# Altium PCB 激光昆虫_USB蓝牙版 - 双面板 板厚1.0mm.PcbDoc
Units mm, origin at the board's own origin, x right, y up, seen from the top; angles counter-clockwise.
Board outline 152.4 x 101.6 mm, 3 copper layers (Top Layer, Mid-Layer 14, Bottom Layer); 12 components, 10 nets, 37 pads, 37 vias.
Unrouted connection lines stored in the file: 2.
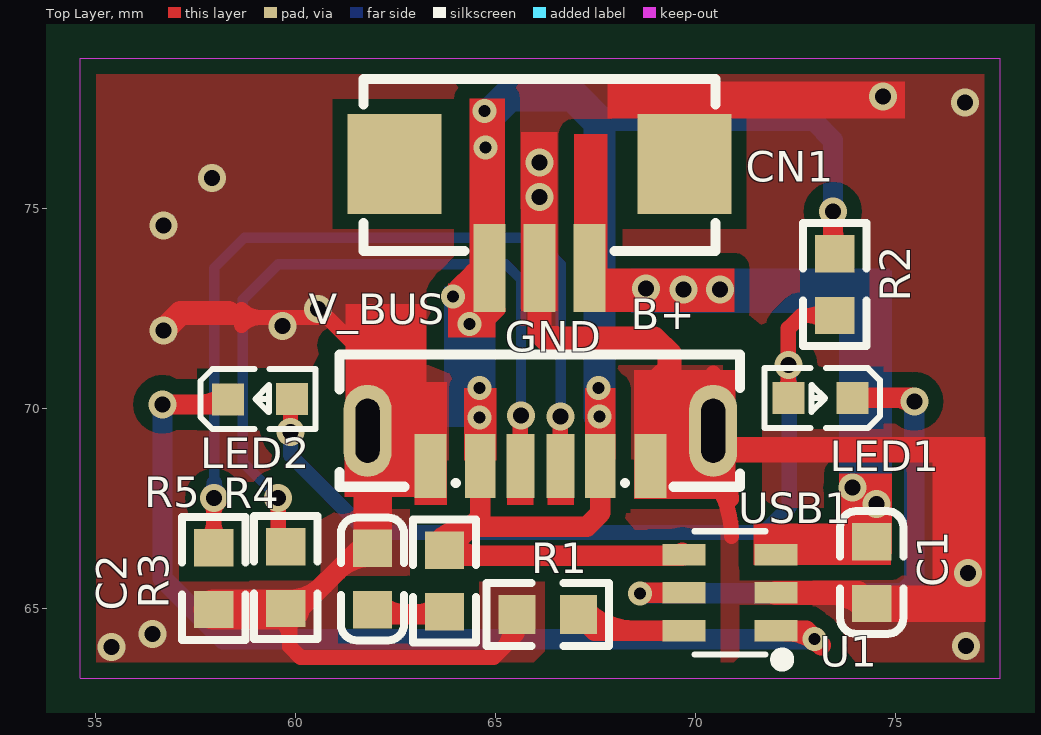
[diagram p0: Top Layer view]
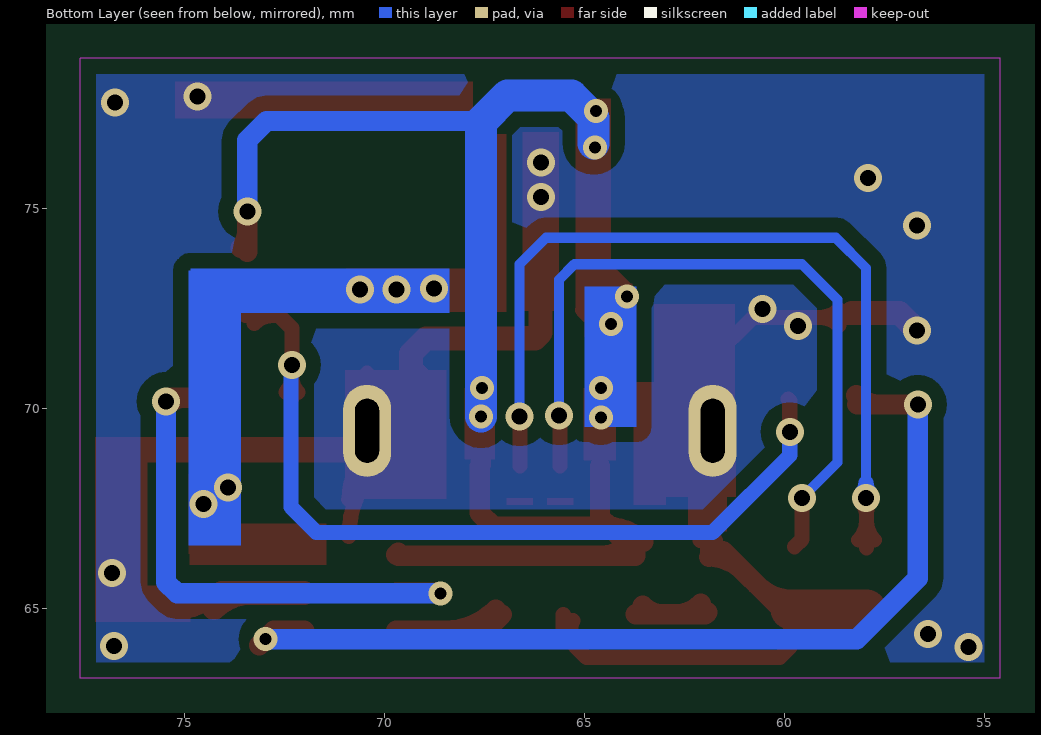
[diagram p1: Bottom Layer view, seen from below]
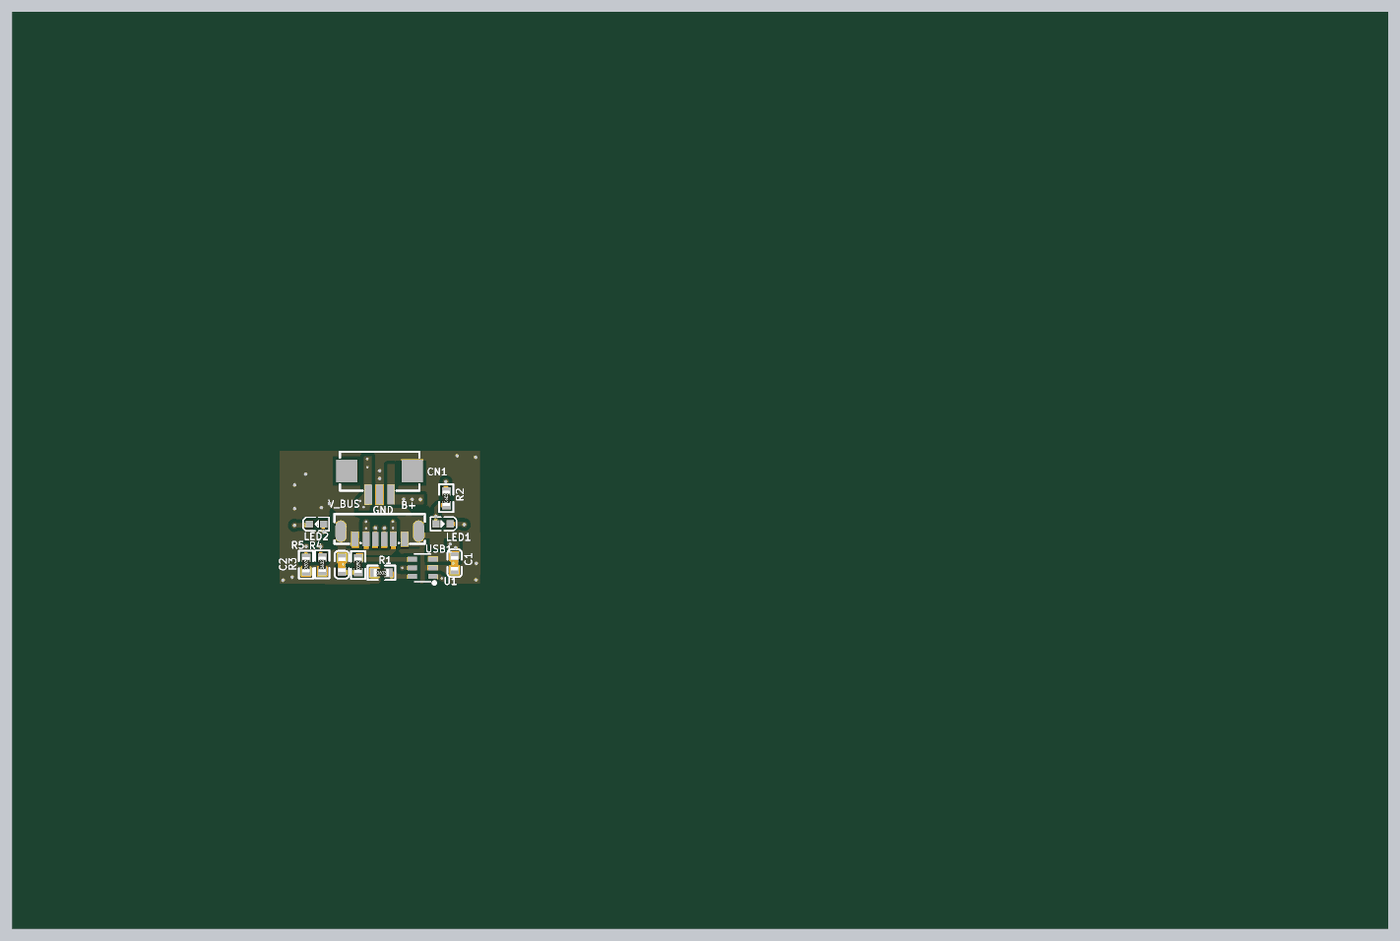
[diagram p2: 3D render of the assembled board from above, using the file's embedded part models]

## Layer stack, top to bottom
Top Layer: signal copper 0.0356
Dielectric: dielectric 0.32, FR-4, Dk 4.8
Mid-Layer 14: signal copper 0.0356
Dielectric: dielectric 0.32, FR-4, Dk 4.8
Bottom Layer: signal copper 0.0356

## Board outline
25.4,25.4 177.8,25.4 177.8,127 25.4,127

## Design rules (kind name [scope] priority, off if disabled: settings)
Clearance [All] p1: gap=0.254
ComponentClearance [All] p1: gap=0.254 collisioncheckmode=3 verticalgap=0 showdistances=FALSE
MinimumSolderMaskSliver [All] p1: minsoldermaskwidth=0.025
PolygonConnect [All] p1: connectstyle=Direct reliefconductorwidth=0.254 reliefentries=4 polygonreliefangle="90 Angle"
RoutingVias [All] p1: holewidth=0.711 width=1.27 viastyle="Through Hole" minholewidth=0.711 minwidth=1.27 maxholewidth=0.711 maxwidth=1.27
SilkToSilkClearance [All] p1: silktosilkclearance=-0.508
SilkscreenOverComponentPads [All] p1: minsilkscreentomaskgap=-0.508
SolderMaskExpansion [All] p1: expansion=0.102
TestPointUsage [All] p1: valid=0 allowmultiple=FALSE
Testpoint [All] p1: side=15 testpointundercomponent=TRUE minsize=1.016 maxsize=2.54 preferedsize=1.524 minholesize=0 maxholesize=1.016 preferedholesize=0.813 testpointgrid=0.025 style=1023 order=0-112345678
Width [All] p1: maxlimit=1.27 minlimit=0.254 preferedwidth=0.381
20 further rules are at their usual default settings.

## Components (designator, comment, footprint, x,y, rotation, side; value= is the part's Value field where it differs from the comment)
C1 "10uf/16v" 0603_C 74.4,65.9 r270 top
C2 "4.7uf/25v" 0603_C 61.918,65.741 r90 top
CN1 "" "HC-1.25-3P 卧贴" 66.15,75.475 r180 top
LED1 "" D0603 72.775,70.325 r180 top
LED2 "" D0603 59.45,70.175 r0 top
R1 "2.7K" 0603_R 66.3,64.85 r0 top
R2 "1K" 0603_R 73.475,73.1 r270 top
R3 "1R" 0603_R 63.718,65.691 r90 top
R4 "5.1K" 0603_R 59.75,65.775 r270 top
R5 "5.1K" 0603_R 57.95,65.75 r270 top
U1 "TP4083-42 4057" SOT-23-6 71.75,65.075 r90 top
USB1 "TYPE-C 6P LTH6.8" "TYPE C 6P 6.8MM" 66.025,69.7 r0 top

## Footprints (in the part's own frame and the unit in brackets; to place one, negate y for a bottom-side part, rotate by r counter-clockwise, add the part's x,y. Pads: shape width x height; smd on the part's side, far side on the other; paste and mask are expansions set on the pad)
0603_C [mm]
  rect 0.93x0.98 smd: 1(-0.77,0) 2(0.77,0)
  silkscreen extent -1.54,-0.79 1.54,0.79, body extent -0.8,-0.4 0.8,0.4, height 0.3
0603_R [mm]
  rect 0.93x0.98 smd: 1(-0.77,0) 2(0.77,0)
  silkscreen extent -1.53,-0.79 1.54,0.79, body extent -0.85,-0.4 0.85,0.4, height 0.56
D0603 [mm]
  rect 0.8x0.8 smd: A(0.459,0.062) K(-1.14,0.055)
  silkscreen extent -1.83,-0.69 1.05,0.82
"HC-1.25-3P 卧贴" [mm]
  rect 0.8x2.2 smd paste+0 mask+0.05: 1(-1.195,1.956) 2(0.055,1.956) 3(1.305,1.956)
  rect 2.35x2.5 smd paste+0 mask+0.05: 4(-3.575,-0.644) 5(3.685,-0.644)
  silkscreen extent -4.34,-2.77 4.46,1.53
SOT-23-6 [mm]
  rect 0.532x1.072 smd mask+0.051: 1(-0.63,-0.258) 2(0.32,-0.258) 3(1.27,-0.258) 4(1.27,2.04) 5(0.32,2.04) 6(-0.63,2.04)
  silkscreen extent -1.5,-0.56 1.86,1.78
"TYPE C 6P 6.8MM" [mm]
  oval 1.2x2.3 hole 0.6 slot 1.6 at 90 deg copper offset 0,0 paste+0 mask+0.05: 1(-4.23,-0.255) 1(4.411,-0.255)
  rect 0.7x1.6 smd paste-100 mask+0.05: A5(-0.41,-1.135) B5(0.591,-1.135)
  rect 0.76x1.6 smd paste-100 mask+0.05: A9(1.592,-1.135) B9(-1.41,-1.135)
  rect 0.8x1.6 smd paste-100 mask+0.05: A12(2.841,-1.135) B12(-2.66,-1.135)
  silkscreen extent -4.93,-1.66 5.08,1.65

## Part data
C1 C2: library part Cap, "Capacitor"
CN1: library part HC-1.25-3PLT
LED1 LED2: library part LED, "发光二极管"
R1 R2 R3 R4 R5: library part RES
U1: library part TP4057-42-SOT26-R
USB1: library part "TYPE-C 6P LTH6.5"

## Via types
v1: diameter 0.7, hole 0.4, Top Layer to Bottom Layer, tented both sides, 27 vias
v2: diameter 0.6, hole 0.3, Top Layer to Bottom Layer, tented both sides, 10 vias

## Nets (pads, with @x,y where several pads share a name; then routed paths per layer and width w, separated by ;. In a path a pad name is that pad's centre, name@x,y a point inside that pad or via, vN(x,y) a via of type N, cw(c..) or ccw(c..) an arc to the next point about the centre after c; other vN are vias at no path point)
B+: C1.1 CN1.1 U1.3 | length 4.4
  Top Layer w0.381: C1.1@74.15,66.345 C1.1@74.4,66.595
  Bottom Layer w0.381: v1(69.698,72.974) 71.78,72.974 71.857,72.898 ; v1@69.81,72.861 cw(c70.083,72.589) 70.083,72.974 cw(c70.083,73.359) v1@69.81,73.087 ; v1@70.499,72.861 ccw(c70.227,72.589) 70.227,72.974 ccw(c70.227,73.359) v1@70.499,73.087 ; v1@70.725,72.861 cw(c70.997,72.589) 70.997,72.974 cw(c70.997,73.359) v1@70.725,73.087
  other v1: 74.524,67.615 73.914,68.021 70.612,72.974 68.758,73
CC1: R4.1 USB1.A5 | length 18.8
  Top Layer w0.381: v1(59.563,67.767) 59.563,66.732 R4.1 ; USB1.A5 v1@65.615,69.806
  Bottom Layer w0.254: v1(59.563,67.767) 58.674,68.656 58.674,72.72 59.563,73.609 65.253,73.609 65.634,73.228 v1(65.634,69.825)
CC2: R5.1 USB1.B5 | length 23.6
  Top Layer w0.381: R5.1@57.756,66.714 ccw(c57.287,67.183) 57.95,67.183 ccw(c58.613,67.183) R5.1@58.144,66.714 ; v1@57.85,67.654 cw(c57.609,67.413) 57.95,67.413 ; R5.1 v1@57.95,67.754 ; 57.95,67.351 cw(c58.379,67.351) v1@58.076,67.654 ; USB1.B5 66.616,69.791 v1(66.624,69.799)
  Bottom Layer w0.254: v1(57.963,67.767) 57.963,73.515 58.718,74.27 65.964,74.27 66.624,73.609 v1(66.624,69.799)
  Bottom Layer w0.381: v1@57.85,67.88 ccw(c57.578,68.152) 57.963,68.152 ccw(c58.348,68.152) v1@58.076,67.88 ; v1@66.624,69.723 v1(66.624,69.799)
CHRG: LED2.K U1.1 | length 26.9
  Top Layer w0.508: v1(56.667,70.104) LED2.K@58.184,70.104 ; 57.653,70.104 ccw(c57.653,70.888) LED2.K@58.207,70.334 ; U1.1 72.766,64.445 v2(72.974,64.237) ; U1.1@72.278,64.433 cw(c72.278,63.226) v2@73.132,64.079 ; U1.1@72.28,64.433 cw(c72.421,63.612) v2@73.01,64.201 ; U1.1@72.36,64.445 cw(c72.36,63.623) v2@72.942,64.204
  Bottom Layer w0.508: v1@56.667,70.129 v1(56.667,70.104) 56.667,65.761 58.191,64.237 v2(72.974,64.237)
GND: C1.2 C2.2 CN1.2 CN1.4 R1.1 R4.2 R5.2 U1.2 USB1.1 USB1.A12 USB1.B12 | length 51.6
  Top Layer w0.381: 58.425,72.28 60.791,72.28 61.795,71.275 USB1.1@61.795,69.445 ; 58.644,72.086 cw(c59.113,71.617) 59.113,72.28 cw(c59.113,72.943) 58.644,72.474 ; R4.2@59.581,64.811 cw(c58.931,64.161) 59.85,64.161 ; 59.85,64.523 cw(c60.257,64.523) R4.2@59.969,64.811 ; R4.2@59.85,65.005 R4.2@59.85,64.98 ; R4.2@60.078,64.98 R4.2@59.85,64.98 ; USB1.1@61.506,68.605 cw(c60.512,67.611) 61.918,67.611 ; USB1.1@61.506,70.285 ccw(c60.808,70.983) 61.795,70.983 ; C2.2@61.543,66.445 C2.2@61.925,66.445 ; C2.2@61.724,66.705 ccw(c61.255,67.173) 61.918,67.173 ccw(c62.58,67.173) C2.2@62.112,66.705 ; 61.795,70.984 ccw(c62.785,70.984) USB1.1@62.085,70.285 ; USB1.1@61.805,69.446 USB1.1@62.072,69.179 ; USB1.1@61.808,68.869 cw(c62.071,68.325) 62.499,68.752 ; USB1.1@61.823,70.001 cw(c62.648,70.189) 62.05,70.788 ; C2.2 61.918,69.025 USB1.1@62.072,69.179 ; 61.918,68.201 cw(c62.489,68.201) USB1.1@62.085,68.605 ; 62.645,68.654 cw(c62.645,67.845) USB1.B12@63.217,68.417 ; USB1.B12@63.365,68.654 62.597,68.654 USB1.1@62.072,69.179 ; 65.18,64.011 ccw(c64.763,64.428) R1.1@65.286,64.699 ; R1.1 65.53,64.362 64.948,63.779 60.122,63.779 59.85,64.051 R4.2@59.85,64.98 ; USB1.A12@69.014,68.417 cw(c69.586,67.845) 69.586,68.654 ; 69.758,68.759 cw(c70.167,68.35) USB1.1@70.423,68.869 ; USB1.1@70.146,68.605 cw(c68.347,66.806) 70.891,66.806 ; USB1.1@70.168,70.305 ccw(c69.664,70.89) 70.436,70.89 ccw(c71.209,70.89) USB1.1@70.703,70.305 ; USB1.1@70.415,68.875 cw(c69.266,67.726) 70.891,67.726
  Top Layer w0.5: R4.2@59.775,65.22 ccw(c59.775,66.53) 60.702,65.604 ; R4.2@60.078,64.98 C2.2@61.543,66.445 ; 61.04,65.942 cw(c61.893,65.09) C2.2@61.893,66.296
  Top Layer w0.6: v1(56.693,71.958) 57.125,72.39 58.315,72.39 ; CN1.2 66.095,71.903 66.243,71.755 68.961,71.755 69.342,71.374 69.342,70.993 69.113,70.764 69.139,70.739 69.139,70.587 ; U1.2 C1.2@74.06,65.395 ; 73.337,65.395 cw(c73.337,64.092) C1.2@74.258,65.013 ; C1.2@74.542,65.247 ccw(c75.004,65.709) 75.004,65.055 ; 76.352,68.217 cw(c77.427,68.217) 76.667,68.976
  Top Layer w1: R5.2 R4.2@59.85,64.98
  other v1: 55.397,64.033 76.759,64.059 56.413,64.364 76.81,65.888 59.665,72.06 60.554,72.492 56.693,74.574 66.091,75.286 57.912,75.768 66.091,76.149 76.733,77.648 74.676,77.8
NetC2_1: C2.1 R3.1 | length 3.1
  Top Layer w0.508: C2.1@61.925,64.905 61.975,64.855 R3.1@63.725,64.855 ; C2.1@62.092,65.12 ccw(c62.731,65.759) 62.731,64.855 ; 63.025,64.855 ccw(c63.025,65.588) R3.1@63.544,65.07
NetLED1_A: LED1.A LED2.A R2.2 | length 23.4
  Top Layer w0.381: v1(59.868,69.418) 59.868,70.196 LED2.A ; LED1.A@72.168,70.411 ccw(c71.81,70.768) 72.316,70.768 ccw(c72.822,70.768) LED1.A@72.464,70.411 ; LED1.A v1(72.316,71.095) 72.316,72.007 72.639,72.33 R2.2 ; R2.2@73.256,72.136 ccw(c72.787,71.667) 72.787,72.33 ccw(c72.787,72.993) R2.2@73.256,72.524
  Bottom Layer w0.381: v1(59.868,69.418) 59.868,68.834 61.798,66.904 71.704,66.904 72.339,67.539 72.339,71.071 v1(72.316,71.095)
NetLED1_K: LED1.K U1.5 | length 14.4
  Top Layer w0.508: v2@68.621,65.395 U1.5 ; LED1.K v1@75.374,70.27 ; 75.016,70.27 cw(c75.016,69.733) v1@75.396,70.112
  Bottom Layer w0.508: v2(68.605,65.38) 75.184,65.38 75.463,65.659 v1@75.463,70.129
  other v1: 75.463,70.18
NetR1_2: R1.2 U1.6 | length 4.2
  Top Layer w0.508: R1.2 67.475,64.445 U1.6 ; R1.2@67.219,64.974 ccw(c68.497,66.252) 68.497,64.445
VCC_USB: CN1.3 R2.1 R3.2 U1.4 USB1.A9 USB1.B9 | length 38.5
  Top Layer w0.381: v2@64.008,73.025 64.414,73.431 ; 64.643,72.06 CN1.3@65.049,72.466
  Top Layer w0.508: R3.2@63.533,66.671 cw(c64.436,65.767) 64.436,67.045 ; R3.2@63.725,66.319 U1.4@69.66,66.319 ; R3.2@63.725,66.395 64.375,67.045 ; R3.2@63.743,66.672 ccw(c63.743,67.296) R3.2@64.185,66.855 ; R3.2@63.892,66.61 ccw(c64.595,67.312) 64.595,66.319 ; USB1.B9 64.615,67.285 64.375,67.045 ; CN1.3@64.729,73.635 CN1.3 ; v2(67.59,69.799) 67.59,68.591 USB1.A9 67.617,67.388 67.273,67.045 64.375,67.045 ; U1.4@69.66,66.395 U1.4 ; R2.1@73.431,73.914 v1(73.431,74.93) ; 73.431,74.424 ccw(c74.004,74.424) R2.1@73.599,74.019
  Bottom Layer w0.508: 67.59,77.191 72.949,77.191 73.431,76.708 v1(73.431,74.93)
  Bottom Layer w0.8: v2@64.77,76.632 64.77,77.267 65.329,77.826 66.929,77.826 67.59,77.165 v2(67.59,69.799)
  other v2: 64.592,69.774 64.592,70.51 67.564,70.51 64.338,72.111 63.932,72.796 64.744,76.53 64.719,77.445
pads on no net: CN1.5

## Polygon pours and split planes (outlines as drawn)
GND on Top Layer "Bottom Layer-No Net" (solid, remove dead copper): 54.61,78.761 77.61,78.761 77.61,63.261 54.61,63.261
GND on Bottom Layer "Bottom Layer-No Net" (solid, remove dead copper): 54.61,78.761 77.61,78.761 77.61,63.261 54.61,63.261

## Keep-outs
Keep-Out Layer:
  lines w0.025: 54.61,63.261 54.61,78.761 77.61,78.761 77.61,63.261 54.61,63.261

## Other copper
Top Layer:
  rectangle net GND: 66.243,71.755 66.564,72.068
  rectangle net GND: 61.918,66.777 62.408,68.174
  rectangle net GND: 61.239,70.663 63.268,72.619
  rectangle net GND: 67.793,77.249 75.235,78.181
  rectangle net B+: 66.954,72.415 67.793,76.86
  rectangle net VCC_USB: 63.805,71.78 64.999,73.127
  rectangle net VCC_USB: 64.338,72.39 65.227,77.749
  rectangle net VCC_USB: 67.234,68.732 67.996,70.51
  rectangle net VCC_USB: 64.211,68.707 65.024,70.51
  rectangle net B+: 67.742,72.415 70.968,73.508
  rectangle net B+: 73.584,66.37 74.905,68.377
  rectangle net GND: 61.214,67.793 63.779,69.393
  rectangle net GND: 61.443,66.929 61.918,68.047
  rectangle net GND: 70.65,68.656 76.632,69.292
  rectangle net B+: 71.45,66.091 74.879,67.132
  rectangle net GND: 65.634,72.441 66.548,76.911
  rectangle net GND: 61.239,69.393 63.779,70.663
  rectangle net GND: 68.453,67.742 70.993,70.968
  rectangle net GND: 62.967,67.589 63.779,67.793
  rectangle net CC1: 66.294,67.589 66.954,67.767
  rectangle net CC2: 65.278,67.589 65.938,67.767
  rectangle net GND: 74.854,64.668 76.657,65.583
  rectangle net GND: 75.921,64.668 77.241,69.291
Bottom Layer:
  rectangle net VCC_USB: 63.703,69.545 64.999,73.05
  rectangle net B+: 68.377,72.39 74.854,73.508
  rectangle net B+: 73.584,66.573 74.905,73.457

## Silkscreen, mask and mechanical layers (free items; w line width, h text height)
Top Overlay:
  text "V_BUS" at 60.325,72.111 h0.76
  text "B+" at 68.377,71.984 h0.76
  text "GND" at 65.227,71.425 h0.76
Top Solder:
  rectangle: 67.208,67.488 68.047,67.716
  rectangle: 66.218,67.488 67.005,67.716
  rectangle: 64.186,67.513 65.024,67.742
  rectangle: 62.916,67.488 63.805,67.716
  rectangle: 68.428,67.513 69.317,67.742
  rectangle: 65.227,67.488 66.015,67.716